# EAGLE board rev10 (EAGLE 7.4.0)
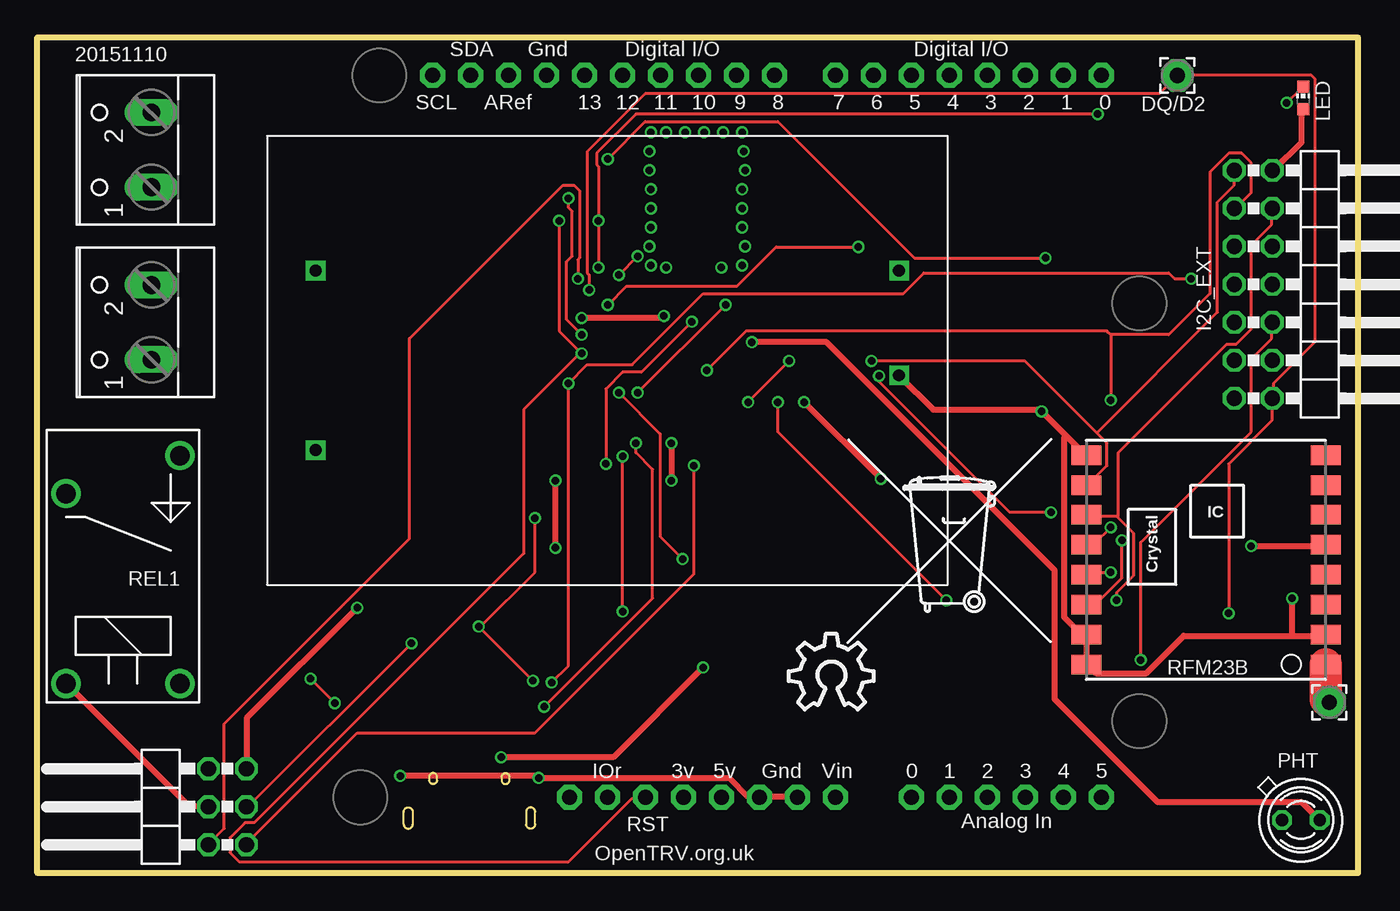
[diagram p0: board, top side]
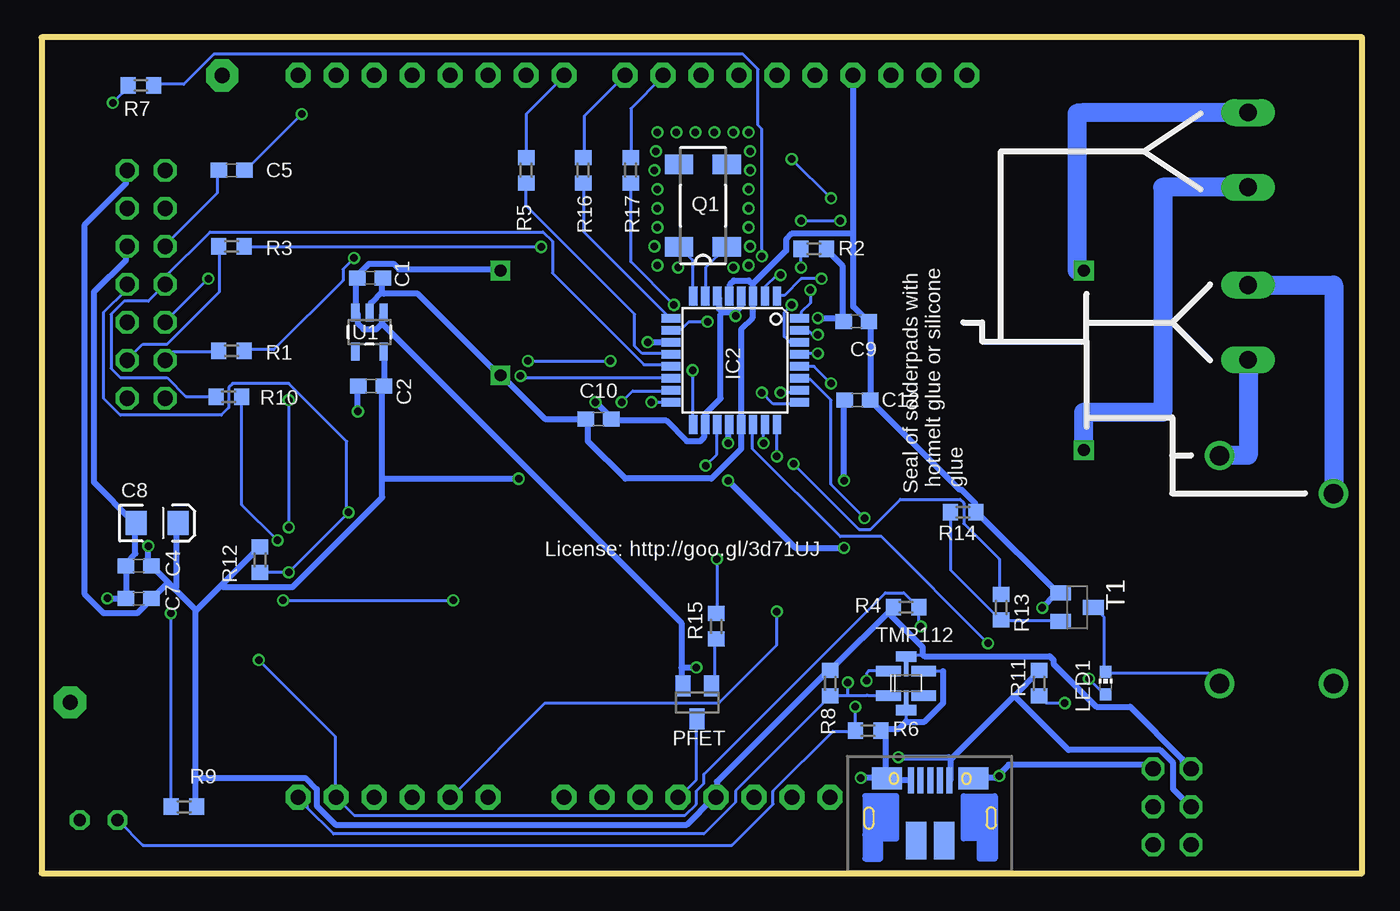
[diagram p1: board, bottom side, seen from below]

Size 88.27 x 55.88 mm. Coordinates in mm from the lower left corner, seen from the top.
Outline: 0,0 0,55.88 88.27,55.88 88.27,0 0,0
Copper layers (1*16): Top 0.035mm / dielectric 1.5mm / Bottom 0.035mm
Design rules "PMServicesStd *": minimum track width 8mil, minimum drill 0.5mm, track to track 8mil, track to pad 8mil, pad to pad 8mil, via to via 8mil, smd to smd 0mil, copper to edge 10mil, drill to drill 10mil, minimum pad ring 10mil, minimum via ring 6mil, stop-mask expansion 2mil, vias tented up to drill 100mil, thermal gap 10mil
Net classes: 0 default: width 0.203 mm; 1 supply: width 0.406 mm, clearance 0.203 mm; 2 ant: width 2.184 mm
tRestrict: area 71.8,36.2 to 75.6,40; area 71.8,8.3 to 75.6,12.1; area 19.7,3.2 to 23.5,7; area 0,25 to 24.8,55.2
bRestrict: area 0,25 to 24.8,55.2; area 19.7,3.2 to 23.5,7; area 71.8,36.2 to 75.6,40; area 71.8,8.3 to 75.6,12.1

## Footprints (pad centres in the part's own frame; a part is rotated, then mirrored left to right if it is on the bottom)
2,15/1,0 = drill 1.016 pad 2.159 octagon: 1 0,0
C0603 = smd 1.1 x 1: 1 -0.85,0; 2 0.85,0
EIA3216 = smd 1.4 x 1.6: A 1.4,0; C -1.4,0
2X07/90 = drill 1.016 octagon: 1 -7.62,-6.35; 2 -7.62,-3.81; 3 -5.08,-6.35; 4 -5.08,-3.81; 5 -2.54,-6.35; 6 -2.54,-3.81; 7 0,-6.35; 8 0,-3.81; 9 2.54,-6.35; 10 2.54,-3.81; 11 5.08,-6.35; 12 5.08,-3.81; 13 7.62,-6.35; 14 7.62,-3.81
TQFP32-08 = smd 1.27 x 0.559: 1 -4.293,2.8; 2 -4.293,2; 3 -4.293,1.2; 4 -4.293,0.4; 5 -4.293,-0.4; 6 -4.293,-1.2; 7 -4.293,-2; 8 -4.293,-2.8; 17 4.293,-2.8; 18 4.293,-2; 19 4.293,-1.2; 20 4.293,-0.4; 21 4.293,0.4; 22 4.293,1.2; 23 4.293,2; 24 4.293,2.8 | smd 0.559 x 1.27: 9 -2.8,-4.293; 10 -2,-4.293; 11 -1.2,-4.293; 12 -0.4,-4.293; 13 0.4,-4.293; 14 1.2,-4.293; 15 2,-4.293; 16 2.8,-4.293; 25 2.8,4.293; 26 2,4.293; 27 1.2,4.293; 28 0.4,4.293; 29 -0.4,4.293; 30 -1.2,4.293; 31 -2,4.293; 32 -2.8,4.293
2X03/90 = drill 1.016 octagon: 1 -2.54,-6.35; 2 -2.54,-3.81; 3 0,-6.35; 4 0,-3.81; 5 2.54,-6.35; 6 2.54,-3.81
CHIP-LED0603 = smd 0.8 x 0.8: A 0,-0.75; C 0,0.75
SOT23 = smd 1 x 1.4: 1 -0.95,-1.1; 2 0.95,-1.1; 3 0,1.1
BPX65 = drill 0.813 octagon: A -0.889,-0.889; K 0.889,0.889
VTX-214-010-205 = drill 0.8 square: + 19.5,6; - 19.5,-1; L -19.5,-6; N -19.5,6
MC-306 = smd 1.3 x 1.9: 1 -2.75,-1.6; 2 2.75,-1.6; 3 2.75,1.6; 4 -2.75,1.6
R0603 = smd 1 x 1.1: 1 -0.85,0; 2 0.85,0
OJE-SS-103HM = drill 1.3: C 13.95,8.91; S 16.49,1.29; S1 1.25,1.29; S2 1.25,8.91
RFM23-XXX-S1 = smd 2 x 1.3: 1 -8,7; 2 -8,5; 3 -8,3; 4 -8,1; 5 -8,-1; 6 -8,-3; 7 -8,-5; 8 -8,-7; 9 8,-7; 10 8,-5; 11 8,-3; 12 8,-1; 13 8,1; 14 8,3; 15 8,5; 16 8,7
SOT23-EBC = smd 1 x 1.4: B 0.95,-1.1; C 0,1.1; E -0.95,-1.1
TMP112 = smd 0.285 x 0.7: 1 -0.5,-0.825; 2 0,-0.825; 3 0.5,-0.825; 4 0.5,0.825; 5 0,0.825; 6 -0.5,0.825; 7 0.777,-0.825; 8 1.325,-0.825; 9 1.05,-0.825; 10 1.868,-0.826; 11 1.595,-0.826; 12 -1.863,-0.825; 13 -1.314,-0.825; 14 -1.59,-0.825; 15 -0.772,-0.825; 16 -1.044,-0.825; 17 -1.86,0.822; 18 -1.312,0.822; 19 -1.587,0.822; 20 -0.769,0.821; 21 -1.041,0.821; 22 0.766,0.824; 23 1.315,0.824; 24 1.039,0.824; 25 1.857,0.823; 26 1.585,0.823; 27 -0.548,1.797; 28 0,1.797; 29 -0.275,1.797; 30 0.543,1.797; 31 0.271,1.797; 32 0.001,1.383; 33 -0.548,-1.798; 34 0,-1.798; 35 -0.275,-1.798; 36 0.543,-1.799; 37 0.271,-1.799; 38 0,-1.322
TC1185 = smd 0.55 x 1.2: 1 -0.95,-1.3; 2 0,-1.3; 3 0.95,-1.3; 4 0.95,1.3; 5 -0.95,1.3
ARDUINO = drill 1 pad 1.676 octagon: 3V 26.67,5.08; 5V 29.21,5.08; A0 41.91,5.08; A1 44.45,5.08; A2 46.99,5.08; A3 49.53,5.08; A4 52.07,5.08; A5 54.61,5.08; AREF 14.986,53.34; D0 54.61,53.34; D1 52.07,53.34; D2 49.53,53.34; D3 46.99,53.34; D4 44.45,53.34; D5 41.91,53.34; D6 39.37,53.34; D7 36.83,53.34; D8 32.766,53.34; D9 30.226,53.34; D10 27.686,53.34; D11 25.146,53.34; D12 22.606,53.34; D13 20.066,53.34; GND 17.526,53.34; GND1 34.29,5.08; GND2 31.75,5.08; IOREF 21.59,5.08; RESERVED 19.05,5.08; RESET 24.13,5.08; SCL 9.906,53.34; SDA 12.446,53.34; VIN 36.83,5.08
MICRO-USB-FCI-10103592 = smd 0.4 x 1.71: 1 3.84,2.51; 2 3.19,2.51; 3 2.54,2.51; 4 1.89,2.51; 5 1.24,2.51 | smd 2 x 1.46: 7 -0.36,2.64; 17 5.44,2.64 | smd 1.375 x 2.5: 11 1.603,-1.52; 12 3.478,-1.52
W237-102 = drill 1.194 long: 1 -2.5,-1.27; 2 2.5,-1.27

## Placement (x,y rotation side)
ANT1  ANT (86 mm)  [2,15/1,0]  86.36,11.43 270 top
C1  10uF 10V  [C0603]  66.3,39.8 0 bottom
C2  10uF 10V  [C0603]  66.24,32.56 0 bottom
C4  100pF  [C0603]  81.78,20.56 0 bottom
C5  100nF  [C0603]  75.56,46.99 180 bottom
C7  100nF  [C0603]  81.77,18.37 180 bottom
C8  100uF  [EIA3216]  80.53,23.41 0 bottom
C9  100nF  [C0603]  33.81,36.9 0 bottom
C10  100nF  [C0603]  51.03,30.37 180 bottom
C12  100nF  [C0603]  33.73,31.64 0 bottom
DQ/D2  [2,15/1,0]  76.2,53.34 0 top
I2C_EXT  [2X07/90]  86.36,39.37 270 top
IC2  ATMEGA168-AU  [TQFP32-08]  41.91,34.29 270 bottom
JP2  [2X03/90]  7.62,4.45 90 top
LED  [CHIP-LED0603]  84.6,51.82 0 top
LED1  [CHIP-LED0603]  17.14,12.7 0 bottom
PFET  BSS84  [SOT23]  44.45,11.43 180 bottom
PHT  BPX65  [BPX65]  84.45,3.56 315 top
PSU  VTX-214-010-205  [VTX-214-010-205]  38.1,34.29 0 top
Q1  32768Hz  [MC-306]  44.06,44.63 90 bottom
R1  4.7K  [R0603]  75.56,34.92 180 bottom
R2  4.7K  [R0603]  36.64,41.75 180 bottom
R3  4.7K  [R0603]  75.56,41.91 180 bottom
R4  4K7  [R0603]  30.48,17.78 0 bottom
R5  4.7K  [R0603]  55.88,46.99 90 bottom
R6  100K  [R0603]  33.02,9.53 0 bottom
R7  470R  [R0603]  81.62,52.67 180 bottom
R8  4K7  [R0603]  35.56,12.7 90 bottom
R9  4.7K  [R0603]  78.74,4.45 0 bottom
R10  1K  [R0603]  75.75,31.86 0 bottom
R11  470R  [R0603]  21.59,12.7 90 bottom
R12  4.7K  [R0603]  73.66,20.95 90 bottom
R13  1K  [R0603]  24.13,17.78 270 bottom
R14  10K  [R0603]  26.67,24.13 180 bottom
R15  4.7K  [R0603]  43.18,16.51 90 bottom
R16  330R  [R0603]  52.07,46.99 270 bottom
R17  4.7K  [R0603]  48.9,46.99 270 bottom
REL1  [OJE-SS-103HM]  10.81,11.43 90 top
RFM23B  RFM23B  [RFM23-XXX-S1]  78.11,20.95 180 top
T1  [SOT23-EBC]  19.05,17.78 270 bottom
TMP112  TMP1  [TMP112]  30.48,12.7 0 bottom
U1  TC1185SMD  [TC1185]  66.35,36.18 180 bottom
U2  ARDUINO  [ARDUINO]  16.51,0 0 top
U$1  [OSHW_10X200_NOTEXT]  50.23,10.95 0 top
U$2  [TONNE]  60.83,19.47 0 top
USBPOWER  MICRO-USB-FCI-10103592  [MICRO-USB-FCI-10103592]  31.41,3.7 0 bottom
X1  [W237-102]  6.35,48.36 90 top
X3  [W237-102]  6.35,36.83 90 top

## Library data of the parts
ANT1 DQ/D2 = wirepad
C1 C2 C4 C5 C7 C9 C10 C12 R1-R17 = resistor
C8 = SparkFun-Passives
I2C_EXT JP2 = pinhead
IC2 = Arduino-AVR
LED LED1 = led
PFET = transistor-small-signal
PHT = opto-trans-siemens; MPN: BPX65.; OC_FARNELL: 327451; OC_NEWARK: 06WX2764
PSU = VTX-214-010-205
Q1 = crystal; MPN: MC-306 60.0KHZ 100PPM ,12.5PF; OC_FARNELL: 1278040; OC_NEWARK: 31M5576
REL1 = OJE-SS-103HM
RFM23B = SparkFun-RF
T1 = transistor
TMP112 = TMP112_2
U1 = 3.3VREG
U2 = arduino
U$1 = ohw-logo
U$2 = logo
USBPOWER = micro-usb-fci-10103592
X1 X3 = con-wago-500; MPN: 237-102; OC_FARNELL: unknown; OC_NEWARK: 70K9898

## Nets
5V [supply]: C1.1 JP2.4 PFET.2 PSU.+ R11.2 REL1.S2 U1.1 U1.3 USBPOWER.1
5VGSM: PFET.3 U2.5V
BOILER: IC2.10 R13.1
D2: DQ/D2.1 I2C_EXT.14 IC2.32 R9.1
GND [supply]: C1.2 C2.1 C4.1 C7.2 C8.C C9.2 C10.2 C12.2 I2C_EXT.6 IC2.3 IC2.5 IC2.21 JP2.5 PSU.- R6.2 R14.1 RFM23B.2 RFM23B.9 RFM23B.15 RFM23B.16 T1.E TMP112.2 TMP112.4 U1.2 U2.GND U2.GND1 U2.GND2 USBPOWER.5 USBPOWER.7 USBPOWER.17
IO_POWER_UP [supply]: IC2.11 PHT.K
LDR: IC2.23 PHT.A R6.1
LED_HEATCALL_L: IC2.2 R7.1
N$1: IC2.19 JP2.1
N$3: IC2.12 R5.1
N$4: PSU.N X1.2
N$5: IC2.22 JP2.3
N$6 [supply]: C12.1 IC2.20
N$7: R10.2 RFM23B.14
N$8: PSU.L X1.1
N$11: IC2.25 R17.2
N$12: R13.2 R14.2 T1.B
N$13: LED.C R7.2
N$14: LED1.C REL1.S1 T1.C
N$15: IC2.24 U2.A1
N$16: LED1.A R11.1
N$17: PFET.1 R15.1
N$19: R5.2 U2.D7
N$20: IC2.9 R16.2
N$22: REL1.C X3.2
N$24: REL1.S X3.1
N$25: C5.2 I2C_EXT.5
N$26: I2C_EXT.12 R3.2
N$28: I2C_EXT.11 R1.2
N$30: R17.1 U2.D9
N$31 [ant]: ANT1.1 RFM23B.1
N$32: R16.1 U2.D8
PFET: IC2.26 R15.2
RESET: C5.1 IC2.29 R2.2 U2.RESET
RFM_IRQ: I2C_EXT.7 IC2.13 R10.1
RX: IC2.31 R1.1
SCL: I2C_EXT.9 IC2.28 R8.1 TMP112.1 U2.A5
SDA: I2C_EXT.10 IC2.27 R4.2 TMP112.6 U2.A4
SPI_MISO: I2C_EXT.1 IC2.16 RFM23B.10
SPI_MOSI: I2C_EXT.4 IC2.15 RFM23B.11
SPI_NSS: I2C_EXT.8 IC2.14 R12.1 RFM23B.13
SPI_SCK: I2C_EXT.3 IC2.17 RFM23B.12
TX: IC2.30 R3.1
VCC [supply]: C2.2 C4.2 C7.1 C8.A C9.1 C10.1 I2C_EXT.2 IC2.4 IC2.6 IC2.18 JP2.6 LED.A R2.1 R4.1 R8.2 R9.2 R12.2 RFM23B.5 TMP112.5 U1.5 U2.3V
VIN: U2.VIN
VOICE: IC2.1 JP2.2
XTAL1: IC2.7 Q1.1
XTAL2: IC2.8 Q1.4

## Tracks (layer width: path | path; a pad name or v marks a point on that pad's centre or on a via)
5V  (via drill 0.5)
  Top 0.406: JP2.4 11.38,4.5 10.12,4.5 2,12.62 REL1.S2 | v31,7.75 38.5,7.75 v44.5,13.75
  Bottom 0.406: 27.5,7.62 23.25,11.88 | 23.25,11.88 21.62,13.5 R11.2 | 27.5,7.62 27.5,6.25 USBPOWER.1 | 23.25,11.88 19.62,8.25 13.5,8.25 12.62,7.38 12.62,5.62 11.5,4.5 JP2.4 | 65.5,36.75 65.5,37.38 U1.1 | 65.5,36.75 65.88,36.38 66.75,36.38 67.12,36.75 67.12,37.38 U1.3 67.25,37.5 67.25,39.75 C1.1 67.12,40 66.38,40.75 64.75,40.75 64.38,40.38 57.62,40.38 PSU.+ | 45.5,13.75 45.5,16.75 65.5,36.75 | 45.5,13.75 45.5,12.62 PFET.2 | v31,7.75 27.62,7.75 27.5,7.62 | 45.5,13.75 v44.5,13.75
5VGSM
  Bottom 0.203: PFET.3 44.5,10.25 44.5,6.25 45.62,5.12 U2.5V
BOILER  (via drill 0.5)
  Top 0.203: v38,27.38 38,32.38 39.12,33.5 40.38,33.5 v43.75,36.88
  Bottom 0.203: v38,27.38 33.62,23 32.88,23 30.88,25 26.88,25 26.62,24.75 26.62,23.38 24.25,21 24.25,18.75 R13.1 | v43.75,36.88 45,36.88 45.5,36.38 46.12,36.38 IC2.10
D2  (via drill 0.5)
  Top 0.203: v79.62,17.38 79.62,27.38 82.5,30.25 82.5,31.75 I2C_EXT.14 82.62,31.75 82.62,32.75 85.38,35.5 85.38,53.12 85.12,53.38 76.25,53.38 DQ/D2.1 76.12,53.25 75,52.12 40.62,52.12 36.75,48.25 36.75,40.12 36.88,40 v36.88,39
  Bottom 0.203: v79.62,17.38 79.62,4.5 R9.1 | v36.88,39 36.88,38.12 37.5,37.5 37.5,37.12 IC2.32
GND  (via drill 0.5)
  Top 0.406: 86.12,16 RFM23B.2 86,15.88 83.88,15.88 | 70.12,14 RFM23B.16 | RFM23B.16 70.12,14.12 70.12,15.88 RFM23B.15 70,16.12 69.62,16.12 68.62,17.12 68.62,29.12 68.75,29.25 | 83.88,15.88 76.62,15.88 74.12,13.38 70.75,13.38 70.25,13.88 RFM23B.16 | 68.75,29.25 70,28 RFM23B.9 70.12,28 | 68.75,29.25 v67.12,30.88 67,31 59.88,31 57.62,33.25 PSU.- | 83.88,15.88 v83.88,18.38 | U2.GND1 50.75,5.12 48.38,5.12 U2.GND2 48.12,5.12 47.5,5.12 46.25,6.38 v33.5,6.38 33.38,6.5 v24.25,6.5 | v21.38,17.75 14,10.38 14,7 JP2.5
  Bottom 0.203: TMP112.4 28,13.53 | TMP112.2 30.48,10.16
  Bottom 0.406: I2C_EXT.6 82.62,41.88 82.62,41 84.75,38.88 84.75,26.12 82.12,23.5 C8.C 82,23.38 82,21.38 82.62,20.75 C4.1 82.62,20.5 C7.2 82.75,18.38 v83.88,18.38 | v67.12,30.88 67.12,32.5 C2.1 | 65.5,38.88 65.5,39.75 C1.2 | 65.5,38.88 66.25,38.12 66.25,37.5 U1.2 | 65.5,38.88 65.38,38.75 63.12,38.75 57.75,33.38 PSU.- 57.5,33.25 54.62,30.38 52,30.38 C10.2 51.75,30.25 51.75,28.88 49.25,26.38 43.5,26.38 41.5,28.38 41.5,29.88 IC2.21 41.5,36.38 40.75,37.12 40.75,38.5 IC2.3 40.75,38.62 40.75,39.38 | 24.31,6.56 23.62,7.25 14.25,7.25 14,7 JP2.5 | 24.31,6.56 24.5,6.38 25.88,6.38 USBPOWER.17 | USBPOWER.5 30.25,6.25 31.75,6.25 USBPOWER.7 | 30.5,10.12 31,9.62 32.12,9.62 R6.2 31.88,9.5 31.88,6.5 USBPOWER.7 | 30.5,10.12 30.48,10.16 | 28,13.53 28,11.38 29.25,10.12 30.5,10.12 | v33.5,6.38 32,6.38 USBPOWER.7 | v24.25,6.5 24.31,6.56 | 40.75,39.38 41,39.62 42,39.62 42.25,39.38 42.25,38.62 IC2.5 | 34,42.75 34,37.88 33.12,37 C9.2 32.88,36.88 32.88,31.75 C12.2 32.75,31.5 26.88,25.62 26.75,25.62 25.88,24.75 25.88,24.25 R14.1 25.75,24.12 20.25,18.62 T1.E 20.5,18.62 v21.38,17.75 | 34,42.75 34,53.25 U2.GND | 40.75,39.38 38.5,41.62 38.5,42.38 38.12,42.75 34,42.75
IO_POWER_UP  (via drill 0.5)
  Top 0.406: v47.75,35.5 52.75,35.5 68,20.25 68,11.62 74.88,4.75 84.5,4.75 85.62,3.62 PHT.K
  Bottom 0.406: v47.75,35.5 46.25,35.5 IC2.11
LDR  (via drill 0.5)
  Top 0.203: v40,28.75 40,28.12 41.12,27 41.12,18.38 v33.88,11.12
  Bottom 0.203: PHT.A 83.12,3.5 81.5,1.88 42.12,1.88 39.38,4.62 39.38,5.5 35.38,9.5 33.88,9.5 R6.1 33.88,9.62 v33.88,11.12 | v40,28.75 40,29.88 IC2.23
LED_HEATCALL_L  (via drill 0.5)
  Top 0.203: v38.88,40 v40.12,41.25
  Bottom 0.203: v40.12,41.25 40.12,49.75 40.38,50 40.38,53.75 41.38,54.75 76.75,54.75 78.75,52.75 80.75,52.75 R7.1 | v38.88,40 39.12,40 39.88,39.25 39.88,38.62 IC2.2
N$1  (via drill 0.5)
  Top 0.203: v43.88,27.25 43.88,20 33.25,9.38 21.38,9.38 14,2 JP2.1
  Bottom 0.203: v43.88,27.25 43.12,28 43.12,29.88 IC2.19
N$3
  Bottom 0.203: R5.1 55.88,46.12 55.88,44.62 48.62,37.38 48.62,35.25 48.12,34.75 46.25,34.75 IC2.12
N$4
  Bottom 1.27: X1.2 18.6,50.86 19.05,50.8 19.05,40.29 PSU.N
N$5  (via drill 0.5)
  Top 0.203: v25,15.38 14,4.38 JP2.3
  Bottom 0.203: v25,15.38 32.12,22.5 34.88,22.5 40.75,28.38 40.75,29.88 IC2.22
N$6  (via drill 0.5)
  Top 0.406: v34.62,21.75 v34.62,26.25 | v42.38,28.75 v42.38,26.25
  Bottom 0.406: v34.62,26.25 34.62,31.62 C12.1 | v34.62,21.75 37.88,21.75 v42.38,26.25 | v42.38,28.75 42.38,29.88 IC2.20
N$7  (via drill 0.5)
  Top 0.203: v72.5,22.25 72.5,19.75 70.75,18 70.12,18 RFM23B.14
  Bottom 0.203: v72.5,22.25 74.88,24.62 74.88,31.75 R10.2
N$8
  Bottom 1.27: X1.1 13.34,45.86 13.34,30.83 18.6,30.83 PSU.L
N$11  (via drill 0.5)
  Top 0.203: v40.12,32.12 v46,38
  Bottom 0.203: v46,38 48.88,40.88 48.88,46.12 R17.2 | v40.12,32.12 39.38,31.38 37.62,31.38 IC2.25
N$12
  Bottom 0.203: 27.62,24.12 R14.2 27.5,24.12 27.5,20.25 24.25,17 R13.2 24.12,16.88 20.25,16.88 T1.B
N$13  (via drill 0.5)
  Top 0.203: v83.5,51.5 84.5,52.5 LED.C
  Bottom 0.203: v83.5,51.5 82.38,52.62 R7.2
N$14
  Bottom 0.203: T1.C 17.88,17.75 17.25,17.12 17.25,13.5 LED1.C 17.12,13.38 10.25,13.38 9.62,12.75 REL1.S1
N$15  (via drill 0.5)
  Top 0.203: v39.12,17.5 v39.12,27.88
  Bottom 0.203: v39.12,27.88 39.12,29.88 IC2.24 | v39.12,17.5 39.12,15.25 43,11.38 54.62,11.38 60.88,5.12 U2.A1
N$16  (via drill 0.5)
  Top 0.203: v19.88,11.38 v18.25,13
  Bottom 0.203: v18.25,13 17.25,12 LED1.A | v19.88,11.38 21.12,11.38 21.5,11.75 R11.1
N$17
  Bottom 0.203: R15.1 43.25,15.62 43.25,12.88 43.5,12.62 PFET.1
N$19
  Bottom 0.203: R5.2 55.88,47.88 55.88,50.75 53.38,53.25 U2.D7
N$20
  Bottom 0.203: R16.2 52,46.12 52,42.88 46.25,37.12 IC2.9
N$21  (via drill 0.5)
  other vias: 40.9,46.99
N$22
  Bottom 1.27: X3.2 1.91,39.33 REL1.C
N$24
  Bottom 1.27: X3.1 7.62,27.94 9.53,27.94 REL1.S
N$25
  Bottom 0.203: C5.2 76.5,46.88 76.5,45.5 80,42 I2C_EXT.5
N$26
  Bottom 0.203: R3.2 76.38,41.88 76.38,38.88 79.88,35.38 81.5,35.38 82.5,34.38 I2C_EXT.12
N$28
  Bottom 0.203: R1.2 76.5,34.88 79.5,34.88 80,34.38 I2C_EXT.11
N$30
  Bottom 0.203: R17.1 48.88,47.88 48.88,51.12 46.75,53.25 U2.D9
N$31
  Top 2.184: RFM23B.1 86.12,13.88 86.12,11.62 86.25,11.5 ANT1.1
N$32
  Bottom 0.203: R16.1 52,47.88 52,50.62 49.38,53.25 U2.D8
N$33  (via drill 0.5)
  other vias: 40.9,48.26
N$34  (via drill 0.5)
  other vias: 42.02,49.53
N$35  (via drill 0.5)
  other vias: 41,49.53
N$36  (via drill 0.5)
  other vias: 43.29,49.53
N$37  (via drill 0.5)
  other vias: 44.56,49.53
N$38  (via drill 0.5)
  other vias: 45.83,49.53
N$39  (via drill 0.5)
  other vias: 47.1,49.53
N$40  (via drill 0.5)
  other vias: 47.2,48.26
N$41  (via drill 0.5)
  other vias: 47.3,46.99
N$42  (via drill 0.5)
  other vias: 47.1,45.72
N$43  (via drill 0.5)
  other vias: 47.1,44.45
N$44  (via drill 0.5)
  other vias: 47.1,43.18
N$45  (via drill 0.5)
  other vias: 47.3,41.91
N$46  (via drill 0.5)
  other vias: 47.1,40.64
N$48  (via drill 0.5)
  other vias: 45.72,40.5
N$49  (via drill 0.5)
  other vias: 41,45.72
N$50  (via drill 0.5)
  other vias: 41,44.45
N$51  (via drill 0.5)
  other vias: 41,43.18
N$52  (via drill 0.5)
  other vias: 40.9,41.91
N$53  (via drill 0.5)
  other vias: 41,40.64
N$54  (via drill 0.5)
  other vias: 42.02,40.5
PFET  (via drill 0.5)
  Top 0.203: v43.12,21 41.62,22.5 41.62,29.38 v38.88,32.12
  Bottom 0.203: v43.12,21 43.12,17.38 R15.2 | v38.88,32.12 37.75,32.12 37.62,32.25 IC2.26
RESET  (via drill 0.5)
  Top 0.203: v37.5,40.5 v37.5,43.62 37.5,47.25 37.38,47.38 37.38,48.12 40,50.75 v70.88,50.75 | v34.88,43.62 34.88,36.25 v36.38,34.75 36.25,34.75 32.5,31 32.5,21.38 14.5,3.38 13.88,3.38 12.88,2.38 12.88,1.38 13.5,0.75 35.5,0.75 39.75,5 40.62,5 U2.RESET
  Bottom 0.203: v37.5,40.5 37.5,41.62 R2.2 | v70.88,50.75 74.62,47 C5.1 | v36.38,34.75 37.5,34.75 IC2.29 | v37.5,43.62 v34.88,43.62
RFM_IRQ
  Bottom 0.203: R10.1 76.62,31.88 78.62,31.88 79.88,33.12 83,33.12 83.62,33.75 83.62,37.38 82.75,38.25 81.12,38.25 80.12,39.25 I2C_EXT.7 80,39.88 77,42.88 54.75,42.88 54.12,42.25 54.12,40.12 48,34 46.25,34 IC2.13
RX  (via drill 0.5)
  Top 0.203: v67.38,41.12 58.62,41.12 49.5,50.25 40.62,50.25 v38.12,47.75 | v35.5,45.12 35.5,44.5 35.75,44.25 35.75,41.25 35.38,40.88 35.38,37 v36.38,36
  Bottom 0.203: v67.38,41.12 68.12,40.38 68.12,39.62 72.75,35 74.62,35 R1.1 | v35.5,45.12 v38.12,47.75 | v36.38,36 36.75,36 37,36.25 37.5,36.25 IC2.31
SCL  (via drill 0.5)
  Top 0.203: v34.38,12.75 35.5,13.88 v35.5,32.75 36.75,34 39.75,34 44.5,38.75 57.88,38.75 59.25,40.12 75.62,40.12 76,39.75 v77.12,39.75
  Bottom 0.203: TMP112.1 33.02,11.88 33.02,11.89 33.12,11.89 33.12,11.88 34.38,11.88 | 34.38,11.88 35.5,11.88 R8.1 35.62,11.75 41.88,5.5 41.88,4.75 44,2.62 68.75,2.62 70.5,4.38 70.5,4.5 71,5 U2.A5 | v35.5,32.75 36.62,33.88 37.5,33.88 IC2.28 | 34.38,11.88 v34.38,12.75 | v77.12,39.75 80,36.88 I2C_EXT.9
SDA  (via drill 0.5)
  Top 0.203: v33.12,12.88 v29.5,16.5 29.62,16.5 33.25,20.12 v33.25,23.75 | v73.75,14.25 73.75,22.12 81.12,29.5 81.12,34.38 82.5,35.75 82.5,36.75 I2C_EXT.10
  Bottom 0.203: TMP112.6 33,13.53 | 33,13.53 33.02,13.53 33.02,13.51 | v29.5,16.5 29.62,16.62 29.62,17.75 R4.2 29.75,17.88 30.62,18.75 31.88,18.75 44,6.62 44,6 44.5,5.5 44.5,4.62 45.25,3.88 67.38,3.88 U2.A4 68.62,5.12 68.62,9.12 v73.75,14.25 | v33.12,12.88 33.12,13.38 33,13.5 33,13.53 | v33.25,23.75 35.5,26 35.5,31.62 36.88,33 37.5,33 IC2.27
SPI_MISO  (via drill 0.5)
  Top 0.203: v50.25,34.25 v47.5,31.5 | v55.75,34.25 66,34.25 70.81,29.44 | 70.81,29.44 71.5,28.75 71.5,27.25 70.12,25.88 RFM23B.10 | 70.81,29.44 78.88,37.5 78.88,44.88 80,46 80,46.88 I2C_EXT.1
  Bottom 0.203: v47.5,31.5 46.25,31.5 IC2.16 | v55.75,34.25 v50.25,34.25
SPI_MOSI  (via drill 0.5)
  Top 0.203: v49.5,31.5 49.5,29.5 v60.75,18.25 | v72.12,18.25 72.12,18.75 73.25,19.88 73.25,22.75 72.19,23.81 | 72.19,23.81 72.12,23.88 70.12,23.88 RFM23B.11 | I2C_EXT.4 82.5,44.38 82.5,43.38 81.12,42 81.12,36.38 80.12,35.38 79.5,35.38 72.25,28.12 72.25,23.88 72.19,23.81
  Bottom 0.203: v49.5,31.5 48.75,32.25 46.25,32.25 IC2.15 | v72.12,18.25 v60.75,18.25
SPI_NSS  (via drill 0.5)
  Top 0.203: v71.75,20.12 70.25,20.12 70.12,20 RFM23B.13 | v56.25,33.25 56.25,32.88 65,24.12 v67.75,24.12
  Bottom 0.203: R12.1 73.62,20.12 v71.75,20.12 v67.75,24.12 67.88,24.12 67.88,28.88 71.75,32.75 75.5,32.75 75.75,32.5 75.75,31.12 76.25,30.62 83,30.62 84.12,31.75 84.12,37.5 82.62,39 82.62,39.25 I2C_EXT.8 | v56.25,33.25 56.12,33.12 46.25,33.12 IC2.14
SPI_SCK  (via drill 0.5)
  Top 0.203: v44.75,33.62 47.38,36.25 71.5,36.25 71.75,36 | 71.75,36 75.62,36 78.38,38.75 78.38,46.88 79.62,48.12 80.5,48.12 81.12,47.5 81.12,45.5 80.12,44.5 I2C_EXT.3 | v71.75,23.12 70.62,22 70.12,22 RFM23B.12 | 71.75,36 v71.75,31.62
  Bottom 0.203: v44.75,33.62 44.75,30 IC2.17 | v71.75,31.62 v71.75,23.12
TX  (via drill 0.5)
  Top 0.203: v54.88,41.88 49.38,41.88 46.75,39.25 39.38,39.25 v38.12,38
  Bottom 0.203: v54.88,41.88 74.62,41.88 R3.1 | v38.12,38 38.62,37.5 38.62,35.88 38.25,35.5 IC2.30
VCC  (via drill 0.5)
  Top 0.406: v36.38,37.12 41.75,37.12 v41.88,37.25 | LED.A 84.5,51 84.5,48.88 82.62,47 I2C_EXT.2 | v81.12,21.88 86,21.88 RFM23B.5 | v56.38,26.38 v51.25,31.5
  Bottom 0.203: TMP112.5 30.48,14.61 29.38,14.61 29.36,14.61
  Bottom 0.406: 29.38,14.62 29.38,15.12 31.62,17.38 R4.1 31.38,17.75 35.5,13.62 R8.2 35.75,13.5 43.12,6.12 43.12,5.12 U2.3V 43.38,5 45.12,3.25 68.62,3.25 69.88,4.5 69.88,5.62 70.62,6.38 78,6.38 | 29.38,14.62 29.38,14.61 | JP2.6 11.5,7 12,7.5 12,7.62 15.5,11.12 17.75,11.12 20.62,14 20.62,14.25 20.88,14.5 29.25,14.5 29.38,14.62 | R2.1 35.75,41.62 34.75,40.62 34.75,37 C9.1 34.88,37.12 v36.38,37.12 | 41.88,37.5 41.5,37.88 41.5,38.5 IC2.4 | 42.75,37.5 41.88,37.5 | 42.75,37.5 43,37.75 43,38.5 IC2.6 | 42.75,37.5 42.88,37.38 42.88,31.75 43.88,30.75 43.88,30.12 IC2.18 44,29.88 44,29.12 44.25,28.88 45.12,28.88 46.5,30.25 50.12,30.25 C10.1 50.25,30.5 v51.25,31.5 | v41.88,37.25 41.88,37.5 | U1.5 65.38,34.88 65.38,32.62 C2.2 65.5,32.38 65.5,26.38 | 78,17.62 78,6.38 | 78,6.38 78,4.5 R9.2 | 79.81,19.44 80.88,20.5 C4.2 81.12,20.62 v81.12,21.88 | 79.81,19.44 79.38,19 | 79.38,19 78,17.62 | 79.81,19.44 80.88,18.38 C7.1 81,18.25 81.88,17.38 84.12,17.38 85.38,18.62 85.38,43.38 82.62,46.12 82.62,46.88 I2C_EXT.2 | 76.25,19.25 77.88,17.62 78,17.62 | 76.25,19.25 73.75,21.75 R12.2 | C8.A 79.25,23.38 79.25,19.12 79.38,19 | 65.5,26.38 65.5,25.12 71.5,19.12 76.12,19.12 76.25,19.25 | 65.5,26.38 v56.38,26.38
VOICE  (via drill 0.5)
  Top 0.203: v36.12,39.75 36.12,41 36.25,41.12 36.25,45.62 35.88,46 35.12,46 24.88,35.75 24.88,22.38 12.5,10 12.5,3 11.5,2 JP2.2
  Bottom 0.203: v36.12,39.75 37.5,39.75 38.62,38.62 39,38.62 IC2.1
XTAL1
  Bottom 0.203: IC2.7 43.88,38.62 43.88,40.5 42.5,41.88 Q1.1
XTAL2
  Bottom 0.203: IC2.8 44.75,38.62 44.75,41 45.62,41.88 Q1.4

## Text on the board
bPlace: License: http://goo.gl/3d71UJ
tNames: 20151110 | OpenTRV.org.uk
bNames: Seal of solderpads with / hotmelt glue or silicone / glue